# EAGLE board IR_RING v23 (EAGLE 9.7.0)
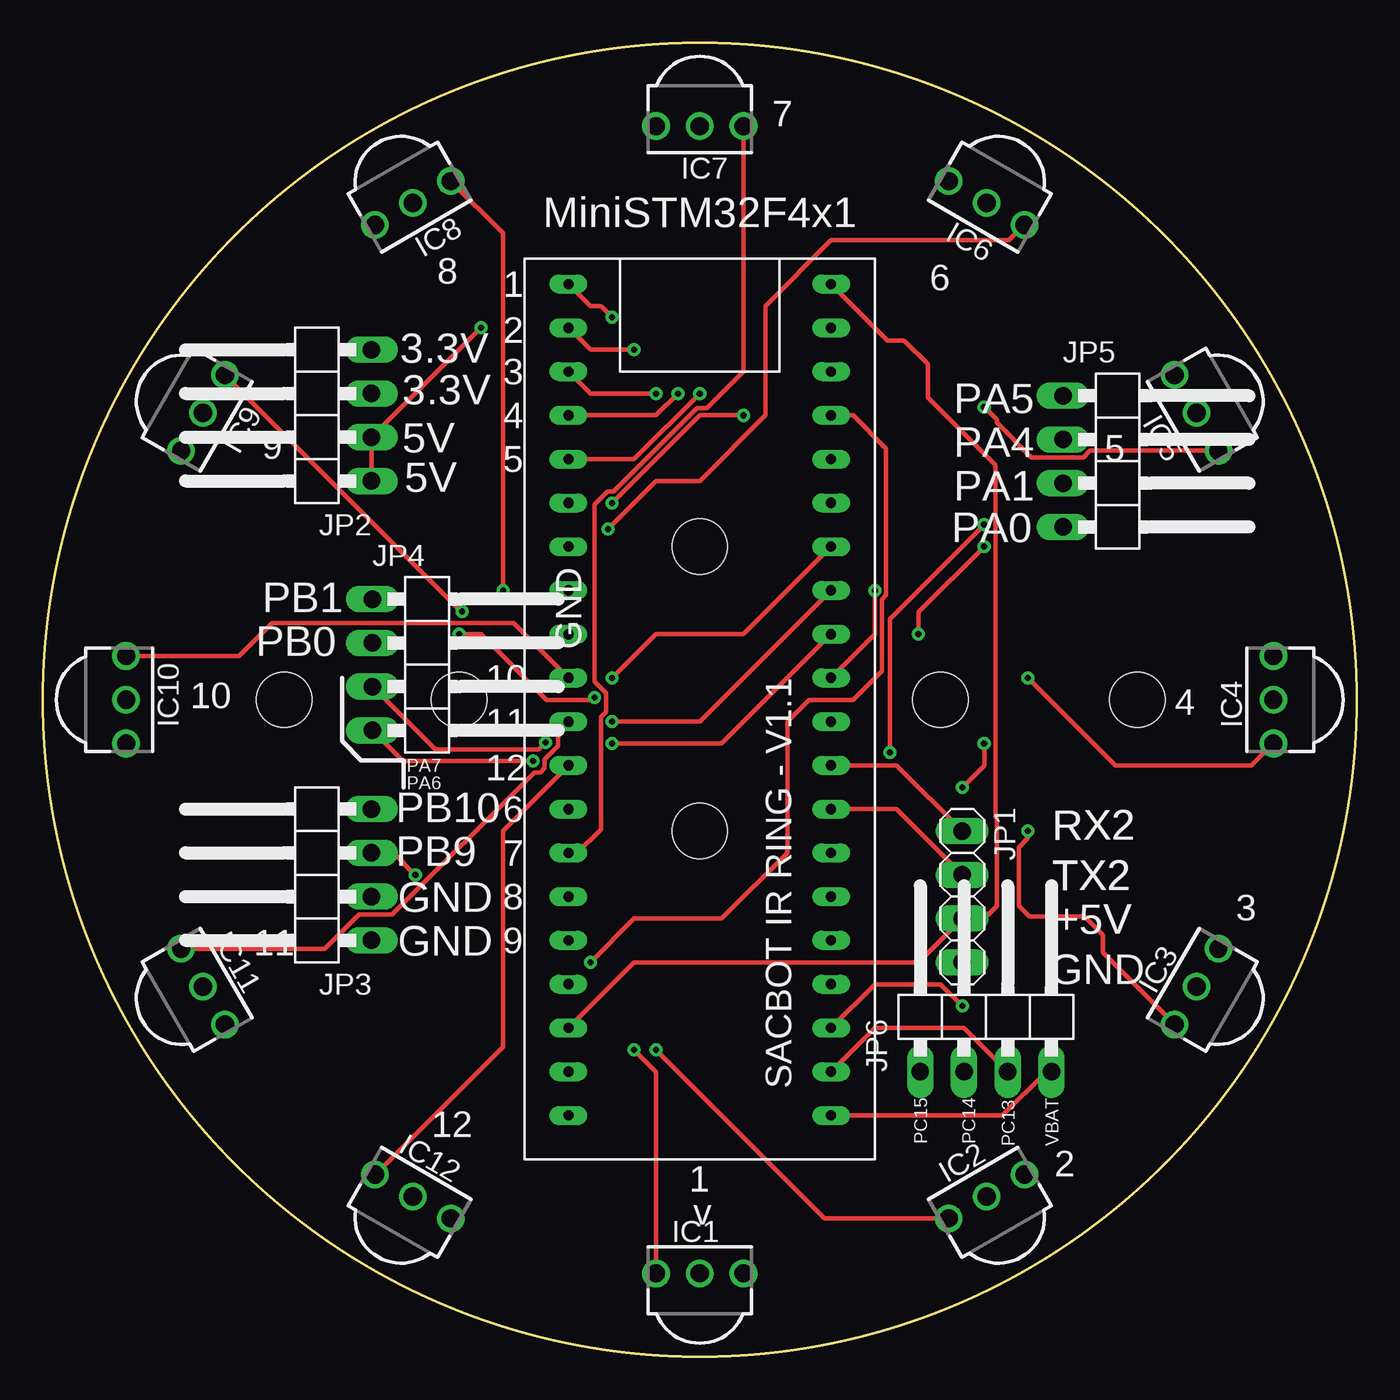
[diagram p0: board, top side]
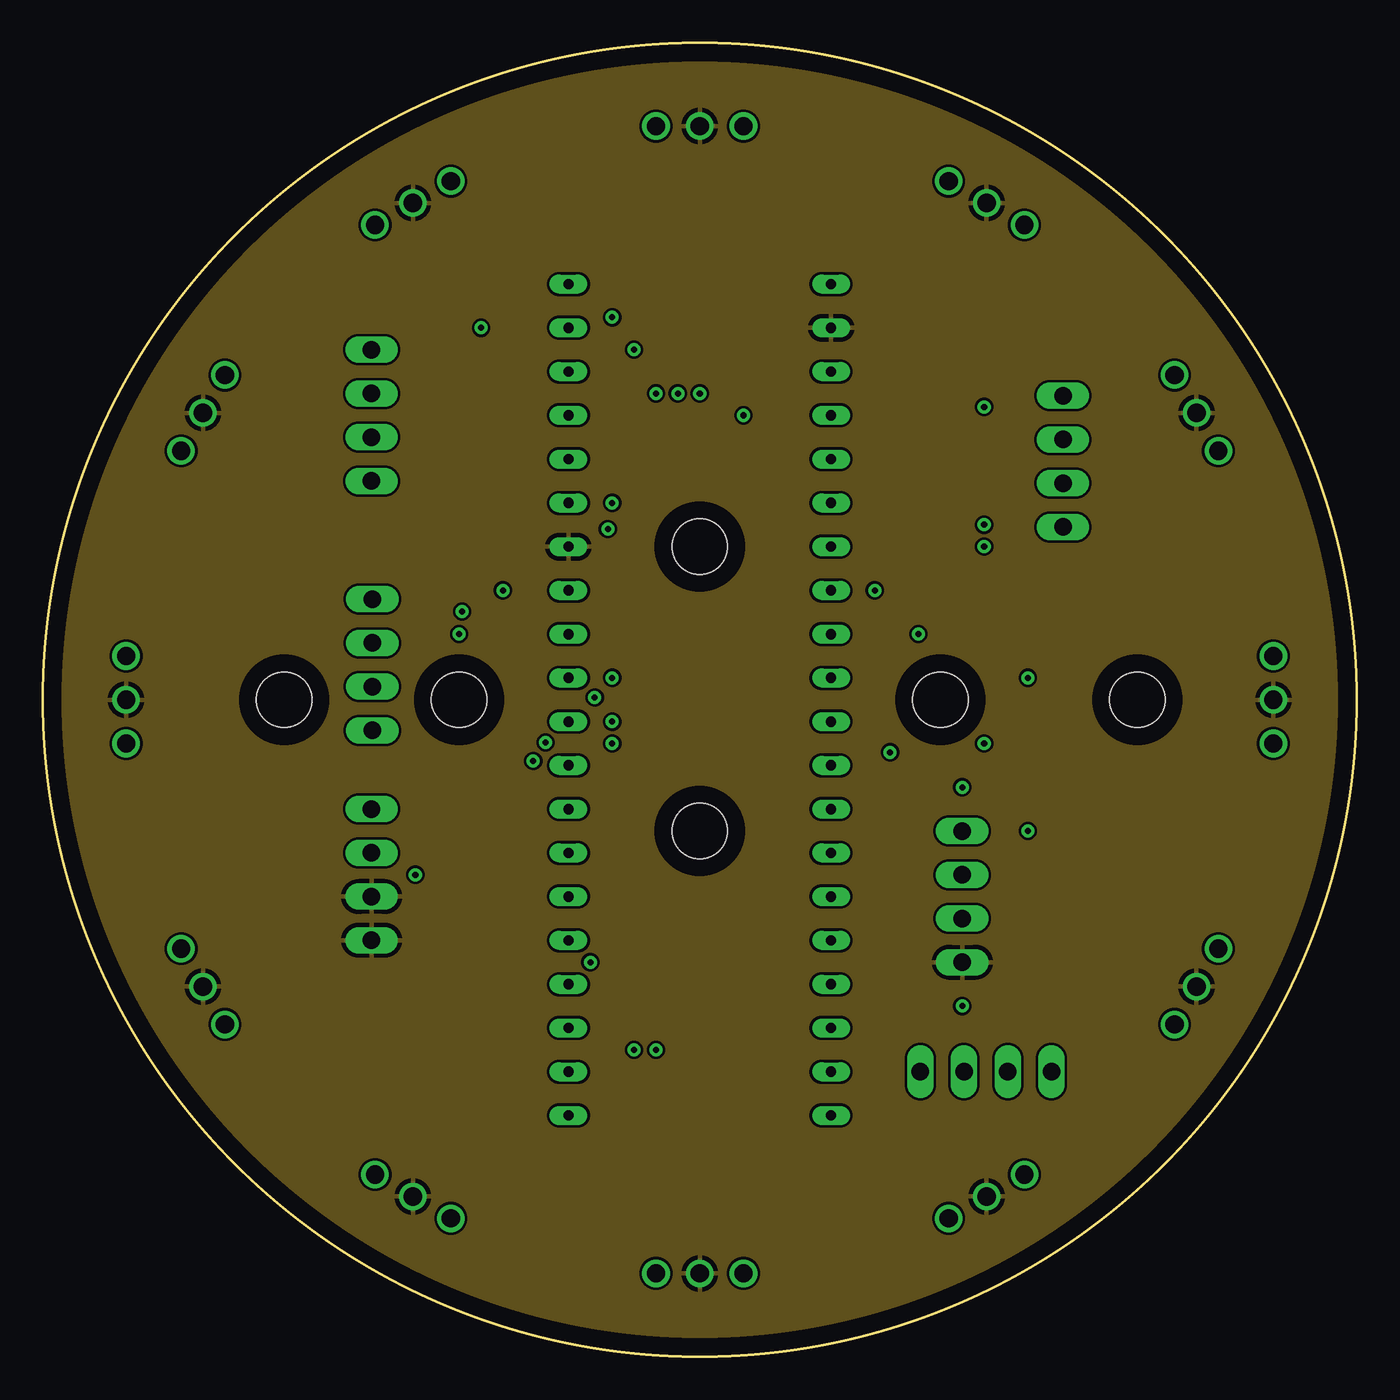
[diagram p1: board, inner layer Route2]
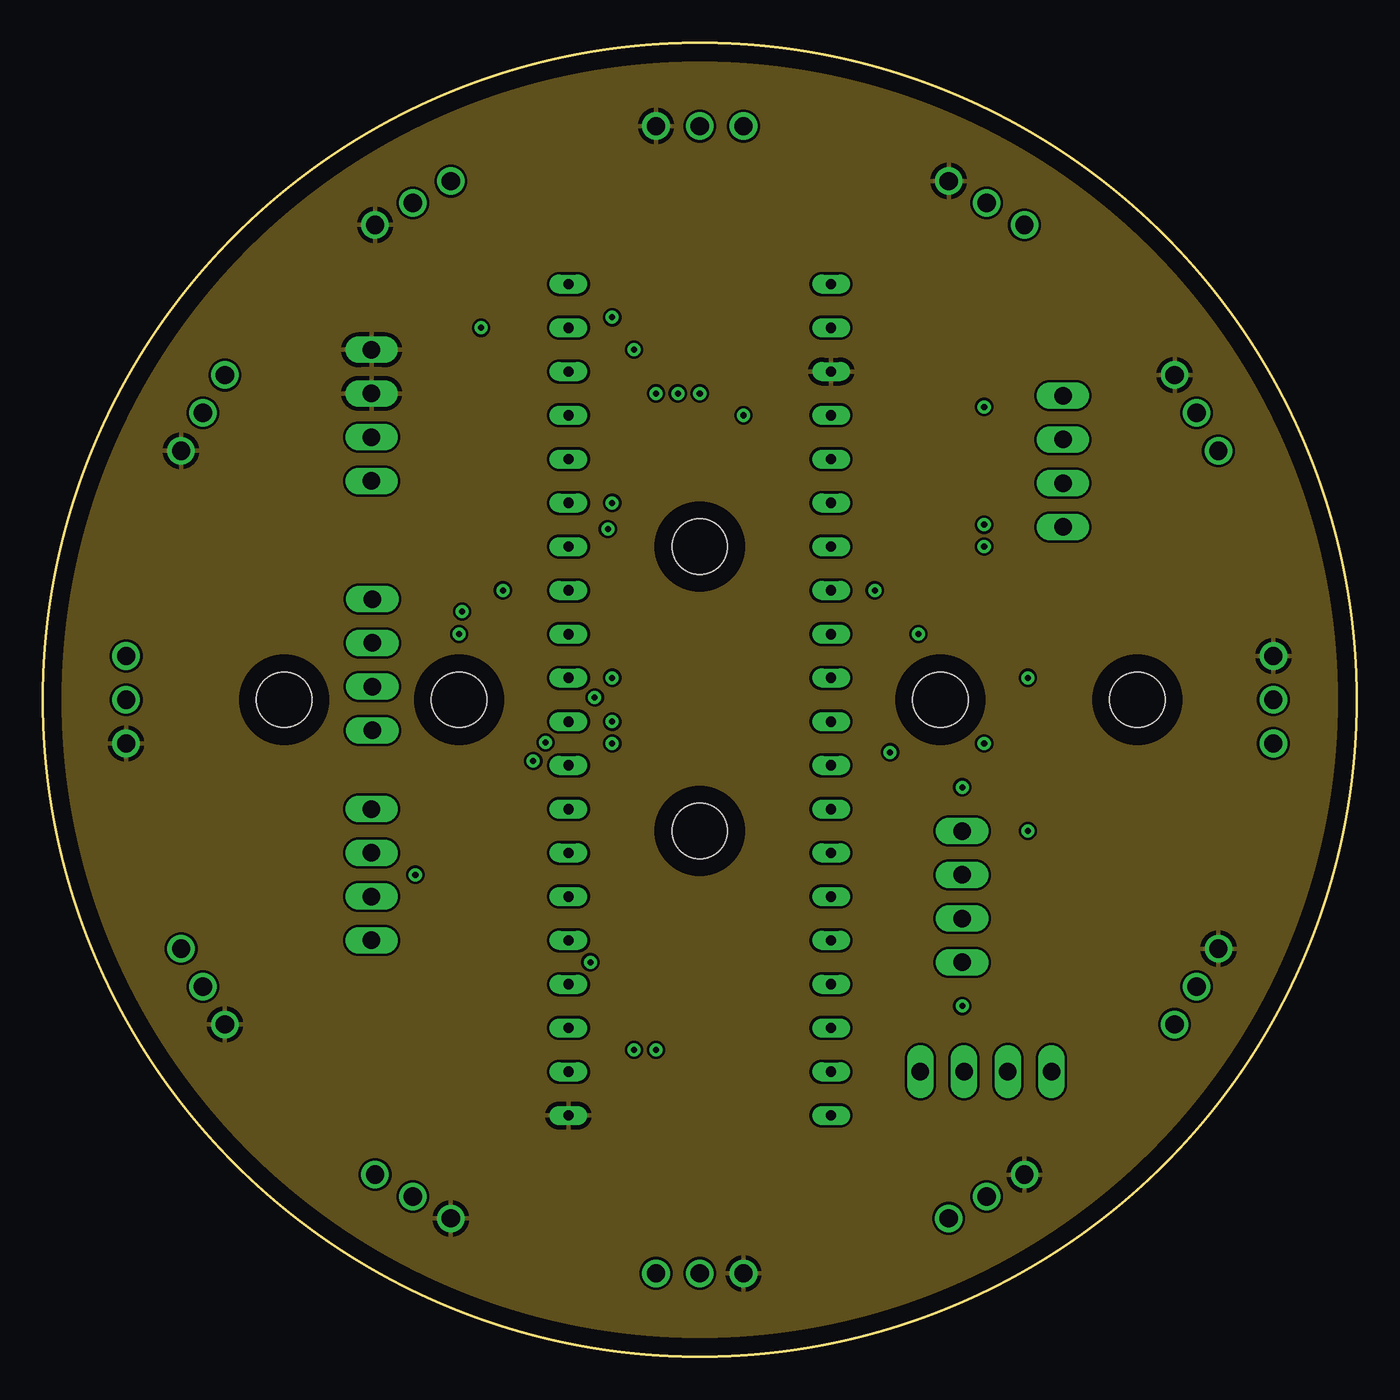
[diagram p2: board, inner layer Route15]
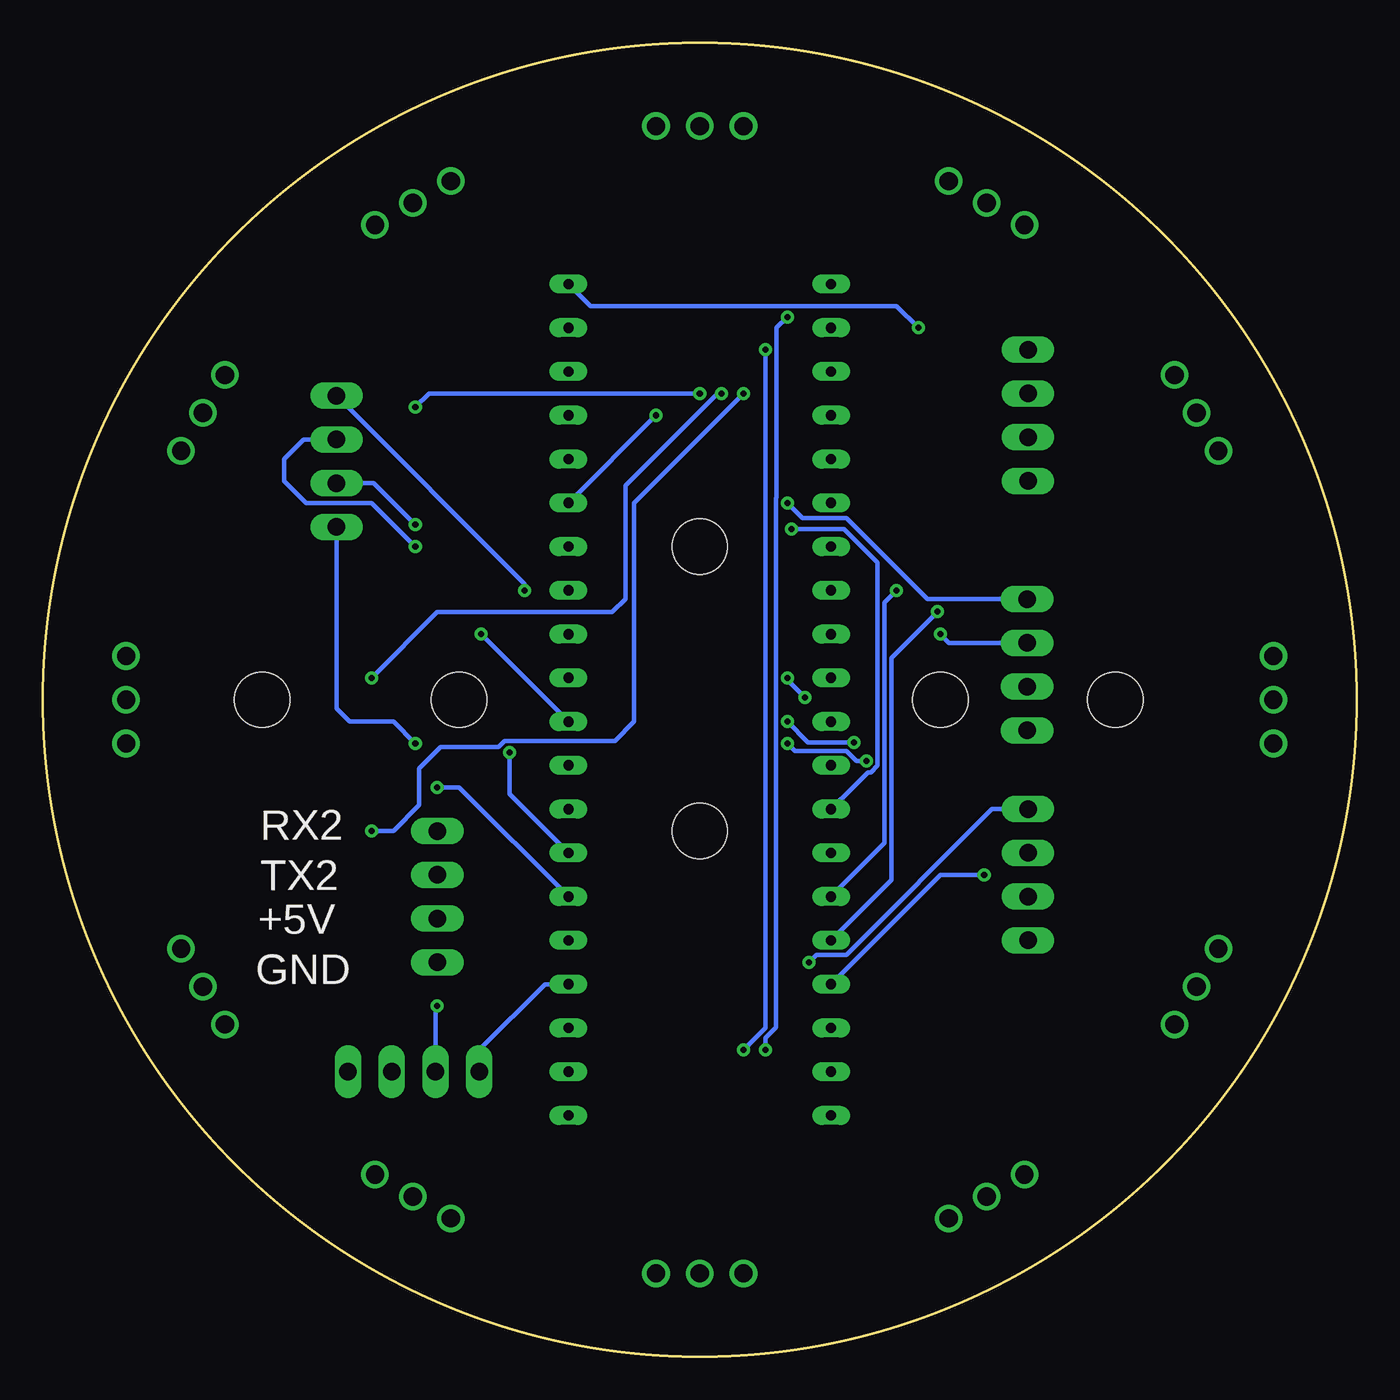
[diagram p3: board, bottom side, seen from below]

Size 76.24 x 76.24 mm. Coordinates in mm from the lower left corner, seen from the top.
Outline: circle at 38.12,38.12 radius 38.12
Copper layers (1+2*15+16): Top 0.035mm / dielectric 1.5mm / Route2 0.035mm / dielectric 0.15mm / Route15 0.035mm / dielectric 0.2mm / Bottom 0.035mm
Design rules "default *": minimum track width 6mil, minimum drill 0.35mm, track to track 6mil, track to pad 6mil, pad to pad 6mil, via to via 6mil, smd to smd 6mil, copper to edge 40mil, drill to drill 6mil, minimum pad ring 10mil, minimum via ring 8mil, stop-mask expansion 4mil, vias tented up to drill 0mil, thermal gap 10mil
Holes 3.2 mm at 38.12,30.5 38.12,47.01 24.15,38.12 52.09,38.12 13.99,38.12 63.52,38.12

## Footprints (pad centres in the part's own frame; a part is rotated, then mirrored left to right if it is on the bottom)
TSSP4038 = drill 1.06 pad 1.6: 1 -2.54,-1.55; 2 0,-1.55; 3 2.54,-1.55
1X04 = drill 1.016 long: 1 -3.81,0; 2 -1.27,0; 3 1.27,0; 4 3.81,0
1X04/90 = drill 1.016 long: 1 -3.81,-3.81; 2 -1.27,-3.81; 3 1.27,-3.81; 4 3.81,-3.81
MINISTM32F4X1 = drill 0.6 long: 3V3 7.62,17.78; 3V3_1 -7.62,-25.4; 5V 7.62,22.86; 5V_1 -7.62,-20.32; GND 7.62,20.32; GND_1 -7.62,-22.86; NRST 7.62,-15.24; PA0 7.62,-12.7; PA1 7.62,-10.16; PA2 7.62,-7.62; PA3 7.62,-5.08; PA4 7.62,-2.54; PA5 7.62,0; PA6 7.62,2.54; PA7 7.62,5.08; PA8 -7.62,12.7; PA9 -7.62,10.16; PA10 -7.62,7.62; PA11 -7.62,5.08; PA12 -7.62,2.54; PA15 -7.62,0; PB0 7.62,7.62; PB1 7.62,10.16; PB2 7.62,12.7; PB3 -7.62,-2.54; PB4 -7.62,-5.08; PB5 -7.62,-7.62; PB6 -7.62,-10.16; PB7 -7.62,-12.7; PB8 -7.62,-15.24; PB9 -7.62,-17.78; PB10 7.62,15.24; PB12 -7.62,22.86; PB13 -7.62,20.32; PB14 -7.62,17.78; PB15 -7.62,15.24; PC13 7.62,-22.86; PC14 7.62,-20.32; PC15 7.62,-17.78; VBAT 7.62,-25.4

## Placement (x,y rotation side)
IC1  TSSP4038  [TSSP4038]  38.12,6.37 0 top
IC2  TSSP4038  [TSSP4038]  54,10.62 30 top
IC3  TSSP4038  [TSSP4038]  65.62,22.25 60 top
IC4  TSSP4038  [TSSP4038]  69.87,38.12 90 top
IC5  TSSP4038  [TSSP4038]  65.62,54 120 top
IC6  TSSP4038  [TSSP4038]  54,65.62 150 top
IC7  TSSP4038  [TSSP4038]  38.12,69.87 180 top
IC8  TSSP4038  [TSSP4038]  22.25,65.62 210 top
IC9  TSSP4038  [TSSP4038]  10.62,54 240 top
IC10  TSSP4038  [TSSP4038]  6.37,38.12 270 top
IC11  TSSP4038  [TSSP4038]  10.62,22.25 300 top
IC12  TSSP4038  [TSSP4038]  22.25,10.62 330 top
JP1  PINHD-1X4  [1X04]  53.36,26.69 270 top
JP2  PINHD-1X4/90  [1X04/90]  15.26,54.63 90 top
JP3  PINHD-1X4/90  [1X04/90]  15.26,27.96 90 top
JP4  PINHD-1X4/90  [1X04/90]  22.93,40.15 270 top
JP5  PINHD-1X4/90  [1X04/90]  63.01,51.96 270 top
JP6  PINHD-1X4/90  [1X04/90]  54.73,20.34 0 top
U$1  MINISTM32F4X1  [MINISTM32F4X1]  38.12,39.39 0 top

## Library data of the parts
IC1-IC12 = TSSP4038; DESCRIPTION: IR Receiver Module 38KHz 25m EMI 3-Pin Vishay TSSP4038, 38kHz IR Receiver, 950nm +/-45 , 25m Range, 2.5V - 5V, Through Hole, 6 x 3.9 x 6.95mm; HEIGHT: mm; MANUFACTURER_NAME: Vishay; MANUFACTURER_PART_NUMBER: TSSP4038; MOUSER_PART_NUMBER: 782-TSSP4038; MOUSER_PRICE-STOCK: https://www.mouser.co.uk/ProductDetail/Vishay-Semiconductors/TSSP4038?qs=lgjwDzixuo3Ja5hn%252BEmOdw%3D%3D
JP1 = Connector; CATEGORY: Headers; DESCRIPTION: Header, Straight, 4 Position; MANUFACTURER: Generic; MPN: Generic; OPERATING_TEMPERATURE: Generic; PART_STATUS: Active; PITCH: 0.100" (2.54mm); ROHS_COMPLIANCE: Generic; SERIES: Generic; SUB-CATEGORY: Headers, Male Pins; TYPE: Board to Board or Cable, Unshrouded, Through Hole, Straight
JP2-JP6 = Connector; CATEGORY: Headers; DESCRIPTION: Header, Right Angle, 4 Position; MANUFACTURER: Generic; MPN: Generic; OPERATING_TEMPERATURE: Generic; PART_STATUS: Active; PITCH: 0.100" (2.54mm); ROHS_COMPLIANCE: Generic; SERIES: Generic; SUB-CATEGORY: Headers, Male Pins; TYPE: Board to Board or Cable, Unshrouded, Through Hole, Right Angle
U$1 = MiniSTM32F4x1

## Nets
1: IC1.1 U$1.PB12
2: IC2.1 U$1.PB13
3: IC3.1 U$1.PB14
4: IC4.1 U$1.PB15
5: IC5.1 U$1.PA8
6: IC6.1 U$1.PB5
7: IC7.1 U$1.PB6
8: IC8.1 U$1.PB7
9: IC9.1 U$1.PB8
10: IC10.1 U$1.PA15
11: IC11.1 U$1.PB3
12: IC12.1 U$1.PB4
+3.3V: IC1.3 IC2.3 IC3.3 IC4.3 IC5.3 IC6.3 IC7.3 IC8.3 IC9.3 IC10.3 IC11.3 IC12.3 JP2.3 JP2.4 U$1.3V3 U$1.3V3_1
+5V: JP1.3 JP2.1 JP2.2 U$1.5V U$1.5V_1
GND: IC1.2 IC2.2 IC3.2 IC4.2 IC5.2 IC6.2 IC7.2 IC8.2 IC9.2 IC10.2 IC11.2 IC12.2 JP1.4 JP3.1 JP3.2 U$1.GND U$1.PA10
GND_1: U$1.GND_1
PA0: JP5.4 U$1.PA0
PA1: JP5.3 U$1.PA1
PA4: JP5.2 U$1.PA4
PA5: JP5.1 U$1.PA5
PA6: JP4.4 U$1.PA6
PA7: JP4.3 U$1.PA7
PB0: JP4.2 U$1.PB0
PB1: JP4.1 U$1.PB1
PB9: JP3.3 U$1.PB9
PB10: JP3.4 U$1.PB10
PC13: JP6.3 U$1.PC13
PC14: JP6.2 U$1.PC14
PC15: JP6.1 U$1.PC15
RX2: JP1.1 U$1.PA3
TX2: JP1.2 U$1.PA2
VBAT: JP6.4 U$1.VBAT

## Tracks (layer width: path | path; a pad name or v marks a point on that pad's centre or on a via)
1  (via drill 0.35)
  Top 0.254: IC1.1 35.58,16.53 v34.31,17.8 | U$1.PB12 31.77,60.98 32.38,60.98 v33.04,60.32
  Bottom 0.254: v34.31,17.8 34.31,18.5 33.7,19.11 33.7,49.82 33.65,49.87 33.65,59.71 v33.04,60.32
2  (via drill 0.35)
  Top 0.254: IC2.1 45.37,8.01 v35.58,17.8 | v34.31,58.44 31.77,58.44 U$1.PB13
  Bottom 0.254: v35.58,17.8 34.31,19.07 34.31,21.61 v34.31,58.44
3  (via drill 0.35)
  Top 0.254: v35.58,55.9 31.77,55.9 U$1.PB14 | IC3.1 61.51,23.45 61.51,24.48 60.45,25.55 57.25,25.55 56.64,26.16 56.64,29.56 57.17,30.09 v57.17,30.5
  Bottom 0.254: v57.17,30.5 55.9,30.5 54.4,32 54.4,34.13 53.16,35.38 49.8,35.38 49.44,35.73 43.05,35.73 41.93,36.85 41.93,49.55 v35.58,55.9
4  (via drill 0.35)
  Top 0.254: IC4.1 70.15,34.31 62.25,34.31 v57.17,39.39 | v36.85,55.9 35.58,54.63 U$1.PB15
  Bottom 0.254: v57.17,39.39 53.36,43.2 43.2,43.2 42.44,43.96 42.44,50.57 37.11,55.9 v36.85,55.9
5  (via drill 0.35)
  Top 0.254: v38.12,55.9 34.31,52.09 U$1.PA8 | v54.63,55.12 55.37,54.38 55.37,54.2 57.38,52.19 60.4,52.19 60.78,52.57 IC5.1
  Bottom 0.254: v54.63,55.12 53.85,55.9 v38.12,55.9
6  (via drill 0.35)
  Top 0.254: IC6.1 56.07,64.79 45.74,64.79 41.93,60.98 41.93,54.63 38.12,50.82 36.85,50.82 35.58,50.82 v32.79,48.03
  Bottom 0.254: U$1.PB5 29.23,33.04 28.37,33.91 28.18,33.91 27.8,34.29 27.8,46.09 29.74,48.03 v32.79,48.03
7
  Top 0.254: IC7.1 40.66,57.17 38.53,55.04 37.95,55.04 33.12,50.21 32.77,50.21 32.03,49.47 32.03,39.18 32.68,38.52 32.68,37.42 32.38,37.12 32.38,30.61 31.01,29.23 U$1.PB6
8  (via drill 0.35)
  Top 0.254: IC8.1 26.69,65.21 26.69,45.74 v26.69,44.47
  Bottom 0.254: v26.69,44.47 27.39,43.77 27.39,29.8 U$1.PB7
9  (via drill 0.35)
  Top 0.254: IC9.1 24.28,43.25 v24.32,43.25
  Bottom 0.254: v24.32,43.25 24.32,43.2 26.99,40.54 26.99,27.67 U$1.PB8
10
  Top 0.254: IC10.1 11.38,40.66 13.31,42.59 27.3,42.59 U$1.PA15
11
  Top 0.254: IC11.1 16.36,23.67 18.34,25.65 20.26,25.65 28.52,33.91 28.87,33.91 29.11,34.15 29.11,34.66 29.89,35.43 29.89,36.24 U$1.PB3
12
  Top 0.254: IC12.1 26.69,17.97 26.69,30.5 U$1.PB4
+3.3V
  pour Route15: 1.32,-13.87 71.11,-13.87 90.11,5.13 90.11,49.52 54.6,85.03 10.21,85.03 -20.22,54.6 -20.22,7.67
+5V  (via drill 0.35)
  Top 0.254: U$1.5V_1 34.31,22.88 45.74,22.88 50.82,22.88 JP1.3 54.63,25.42 55.37,26.16 55.37,31.24 55.29,31.32 55.29,51.74 51.35,55.67 51.35,57.6 49.98,58.97 49.02,58.97 U$1.5V | JP2.1 JP2.2 v25.42,59.71
  Bottom 0.254: v25.42,59.71 26.69,60.98 29.23,60.98 44.47,60.98 U$1.5V
GND
  pour Route2: 1.32,-13.87 71.11,-13.87 90.11,5.13 90.11,49.52 54.6,85.03 10.21,85.03 -20.22,54.6 -20.22,7.67
PA0  (via drill 0.35)
  Top 0.254: v53.36,33.04 54.63,34.31 v54.63,35.58
  Bottom 0.254: U$1.PA0 52.09,33.04 v53.36,33.04 | v54.63,35.58 55.9,36.85 58.44,36.85 59.2,37.61 JP5.4
PA1  (via drill 0.35)
  Top 0.254: v49.17,35.07 49.17,42.82 v54.63,48.28
  Bottom 0.254: U$1.PA1 49.17,32.66 v49.17,35.07 | v54.63,48.28 57.04,50.69 JP5.3
PA4  (via drill 0.35)
  Top 0.254: v50.82,41.93 50.82,43.2 v54.63,47.01
  Bottom 0.254: U$1.PA4 v50.82,41.93 | v54.63,47.01 57.17,49.55 60.98,49.55 62.25,50.82 62.25,52.09 61.11,53.23 JP5.2
PA5  (via drill 0.35)
  Top 0.254: v48.28,44.47 48.28,41.93 U$1.PA5
  Bottom 0.254: JP5.1 48.28,44.85 v48.28,44.47
PA6  (via drill 0.35)
  Top 0.254: JP4.4 20.9,34.57 v28.46,34.57 | v33.04,35.58 39.39,35.58 U$1.PA6
  Bottom 0.254: v28.46,34.57 29.02,34.57 29.6,35.14 32.6,35.14 v33.04,35.58
PA7  (via drill 0.35)
  Top 0.254: v33.04,36.85 38.12,36.85 U$1.PA7 | v29.17,35.64 28.75,35.22 22.78,35.22 JP4.3
  Bottom 0.254: v29.17,35.64 31.83,35.64 v33.04,36.85
PB0  (via drill 0.35)
  Top 0.254: v24.15,41.93 25.42,41.93 29.23,38.12 31.9,38.12 v32.03,38.25 | v33.04,39.39 35.58,41.93 40.66,41.93 U$1.PB0
  Bottom 0.254: JP4.2 23.64,41.42 v24.15,41.93 | v32.03,38.25 33.04,39.26 v33.04,39.39
PB1  (via drill 0.35)
  Top 0.254: v33.04,49.55 38.12,54.63 v40.66,54.63
  Bottom 0.254: JP4.1 24.91,43.96 29.23,48.28 29.61,48.66 32.03,48.66 32.15,48.66 v33.04,49.55 | v40.66,54.63 U$1.PB1
PB9  (via drill 0.35)
  Top 0.254: JP3.3 20.34,29.23 v21.61,27.96
  Bottom 0.254: v21.61,27.96 24.15,27.96 U$1.PB9
PB10  (via drill 0.35)
  Top 0.254: v31.77,22.88 34.31,25.42 39.39,25.42 43.2,29.23 43.2,36.85 44.47,38.12 47.01,38.12 48.69,39.8 48.69,43.95 48.94,44.2 48.94,52.7 47.01,54.63 U$1.PB10
  Bottom 0.254: v31.77,22.88 31.33,23.32 29.6,23.32 21.15,31.77 JP3.4
PC13
  Top 0.254: U$1.PC13 48.28,19.07 52.09,19.07 53.46,19.07 JP6.3
PC14  (via drill 0.35)
  Top 0.254: U$1.PC14 48.28,21.61 52.09,21.61 v53.36,20.34
  Bottom 0.254: v53.36,20.34 53.46,20.24 JP6.2
PC15
  Bottom 0.254: JP6.1 50.92,17.8 47.11,21.61 U$1.PC15
RX2
  Top 0.254: U$1.PA3 49.55,34.31 JP1.1
TX2
  Top 0.254: U$1.PA2 49.55,31.77 JP1.2
VBAT
  Top 0.254: JP6.4 58.24,16.53 55.7,13.99 U$1.VBAT

## Text on the board
tPlace: 7 | 8 | 6 | 1 | 2 | 3.3V | 3 | 3.3V | PA5 | 4 | 9 | 5V | PA4 | 5 | 5 | 5V | PA1 | PA0 | PB1 | PB0 | GND | 10 | SACBOT IR RING - V1.1 | 10 | 4 | 11 | PA7 | PA6 | 12 | PB10 | 6 | RX2 | RX2 | PB9 | 7 | TX2 | TX2 | GND | 8 | 3 | +5V | +5V | 11 | GND | 9 | GND | 12 | PC15 | PC14 | PC13 | VBAT | 2 | 1 | v
bPlace: RX2 | TX2 | +5V | GND